# EAGLE board main (EAGLE 9.5.1)
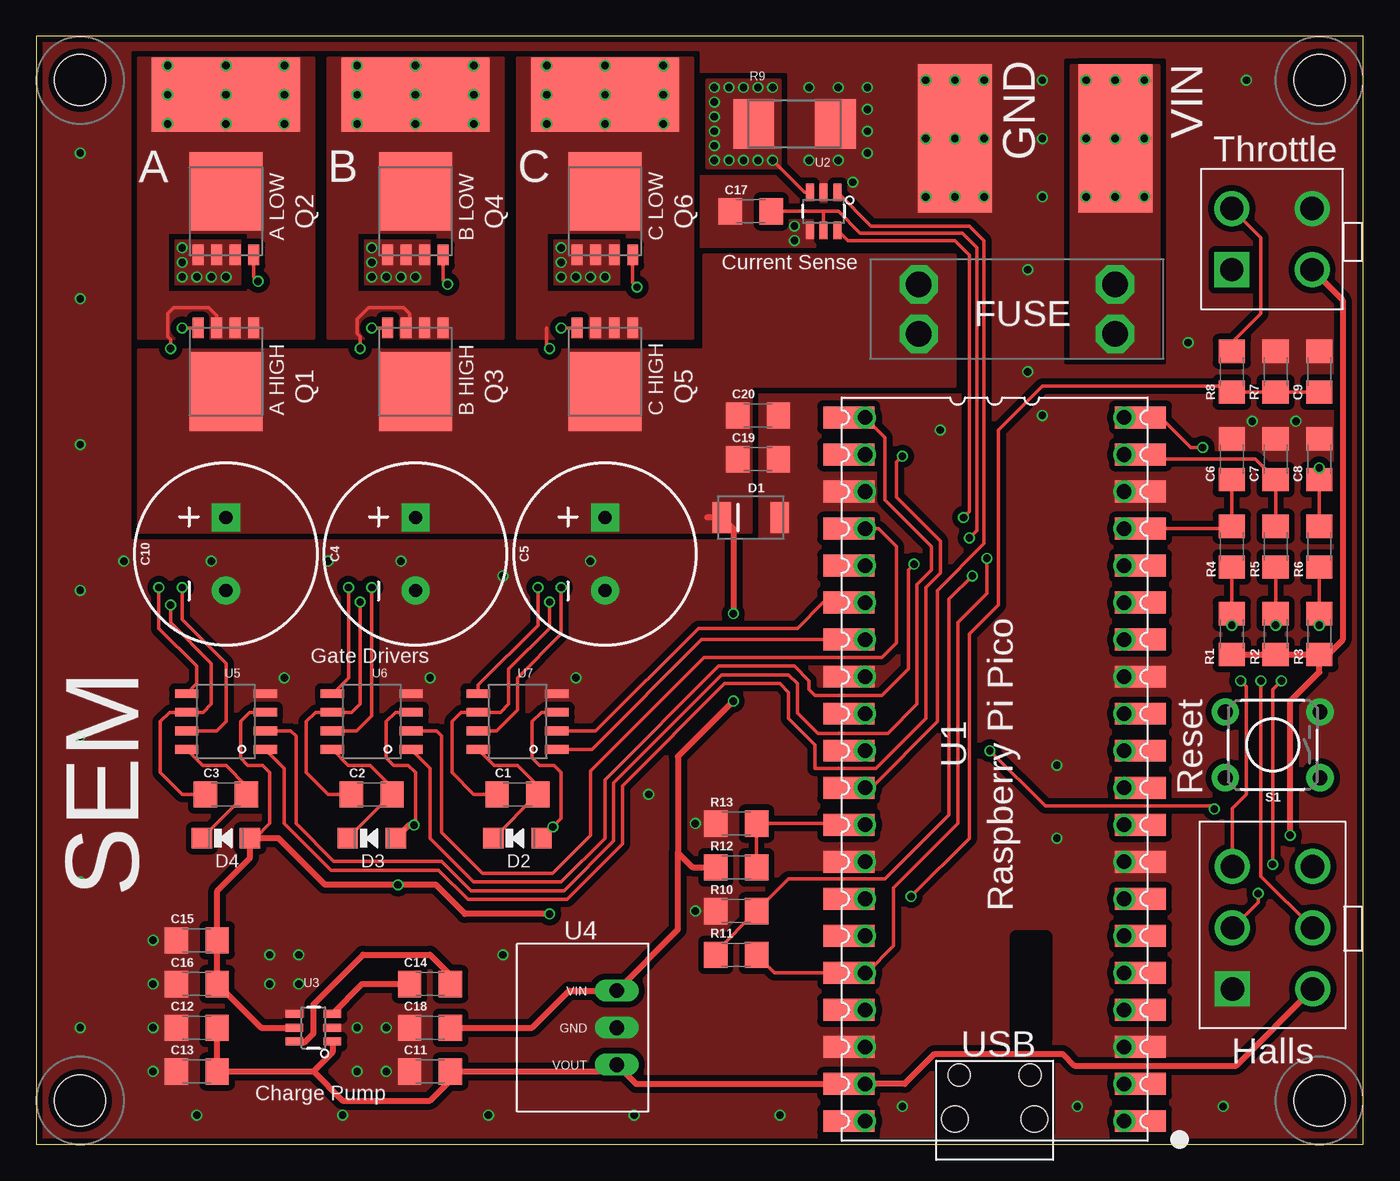
[diagram p0: board, top side]
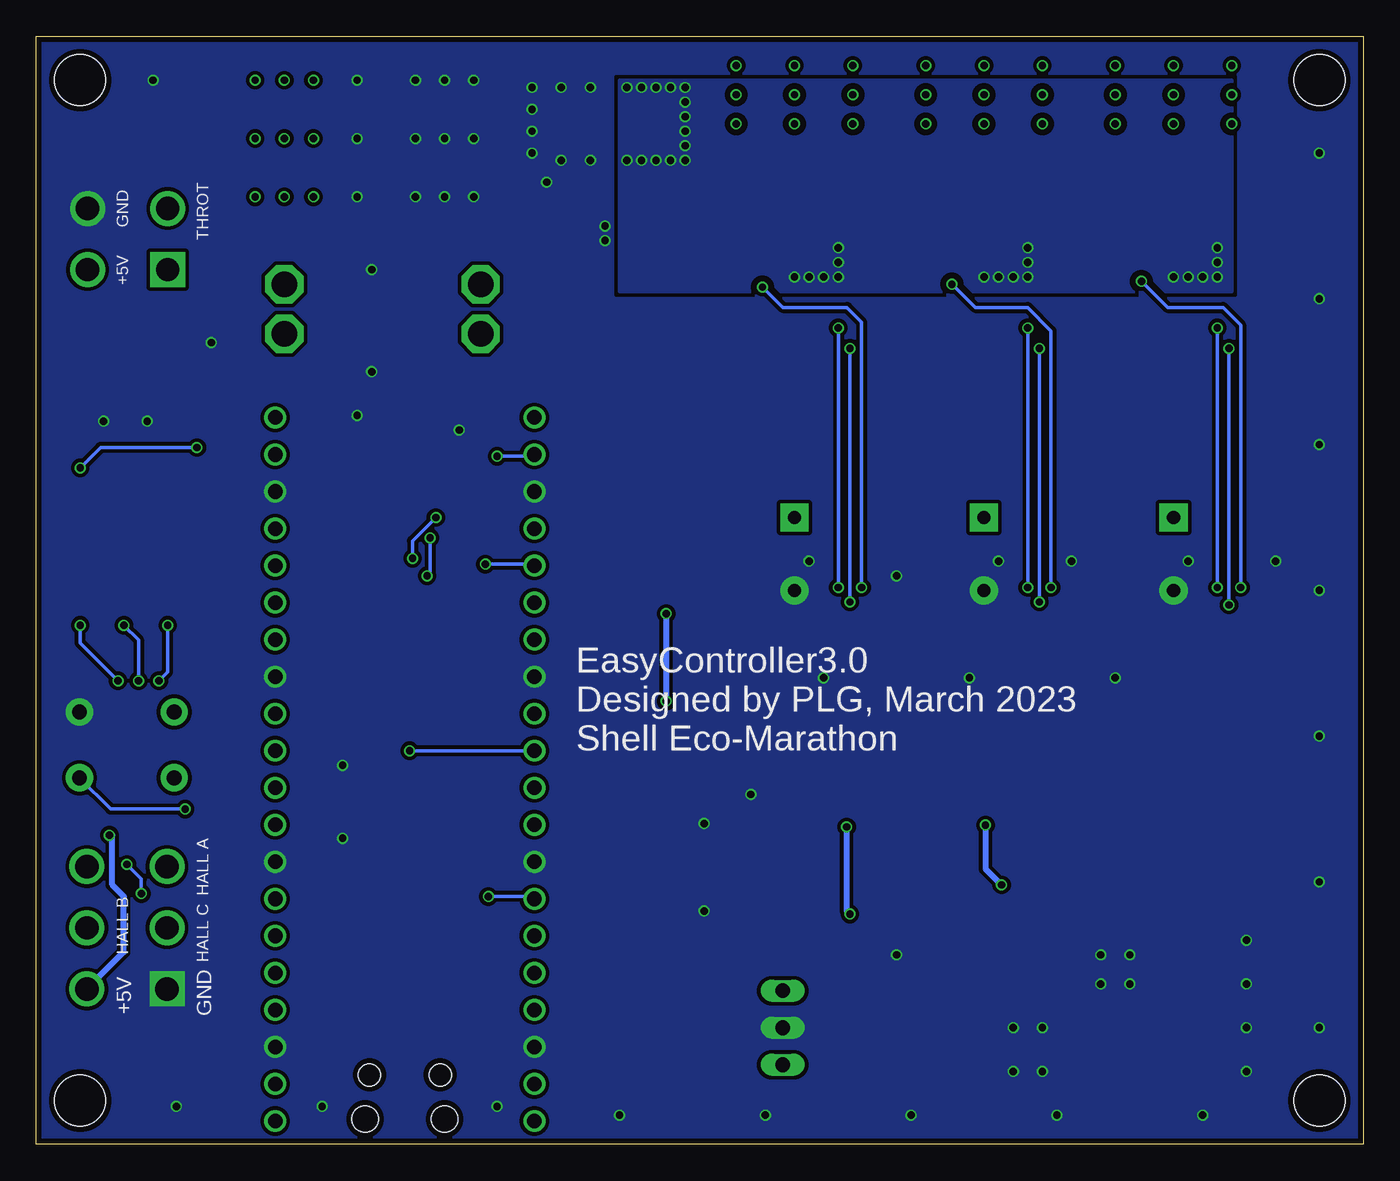
[diagram p1: board, bottom side, seen from below]

Size 91 x 76 mm. Coordinates in mm from the lower left corner, seen from the top.
Outline: 0,0 91,0 91,76 0,76 0,0
Copper layers (1*16): Top 0.035559375mm / dielectric 1.6mm / Bottom 0.035559375mm
Design rules "PATRICK-2lyr *": minimum track width 6mil, minimum drill 10mil, track to track 6mil, track to pad 6mil, pad to pad 6mil, via to via 6mil, smd to smd 6mil, copper to edge 15mil, drill to drill 6mil, minimum pad ring 5mil, minimum via ring 5mil, stop-mask expansion 2.5mil, vias tented up to drill 25mil, thermal gap 10mil

## Footprints (pad centres in the part's own frame; a part is rotated, then mirrored left to right if it is on the bottom)
1206 = smd 1.6 x 1.8: 1 -1.4,0; 2 1.4,0
CPOL-RADIAL-5MM-10MM = drill 0.9 pad 1.93 square: + 2.5,0 | drill 0.9 pad 1.93: - -2.5,0
DO-214AC = smd 1.27 x 2.1: A 1.985,0; C -1.985,0
SOD-123 = smd 1.397 x 1.397: + -1.651,0; - 1.651,0
4PINVALULOK = drill 1.6 square: 1 0,5.5 | drill 1.6: 2 0,0; 3 4.2,5.5; 4 4.2,0
6PINVALULOK = drill 1.6 square: 1 -6.35,2.96 | drill 1.6: 2 -6.35,-2.54; 3 -2.15,2.96; 4 -2.15,-2.54; 5 2.05,2.96; 6 2.05,-2.54
AUTO_FUSE = drill 1.75 octagon: 1A 0,3.4; 1B 0,0; 2A 13.47,3.4; 2B 13.47,0
DFN5X6 = smd 0.75 x 1.4: 1 -1.905,-3; 2 -0.635,-3; 3 0.635,-3; 4 1.905,-3 | smd 5 x 5.4: PAD 0,1.37
R2512 = smd 2.8 x 3.4: 1 -2.8,0; 2 2.8,0
TACTILE_SWITCH_PTH_6.0MM = drill 1.016 pad 1.88: 1 -3.251,2.261; 2 3.251,2.261; 3 -3.251,-2.261; 4 3.251,-2.261
PICO-PKG-NO_DEBUG = drill 1: 1 -7.62,25.4; 2 -7.62,22.86; 3 -7.62,20.32; 4 -7.62,17.78; 5 -7.62,15.24; 6 -7.62,12.7; 7 -7.62,10.16; 8 -7.62,7.62; 9 -7.62,5.08; 10 -7.62,2.54; 11 -7.62,0; 12 -7.62,-2.54; 13 -7.62,-5.08; 14 -7.62,-7.62; 15 -7.62,-10.16; 16 -7.62,-12.7; 17 -7.62,-15.24; 18 -7.62,-17.78; 19 -7.62,-20.32; 20 -7.62,-22.86; 21 10.16,-22.86; 22 10.16,-20.32; 23 10.16,-17.78; 24 10.16,-15.24; 25 10.16,-12.7; 26 10.16,-10.16; 27 10.16,-7.62; 28 10.16,-5.08; 29 10.16,-2.54; 30 10.16,0; 31 10.16,2.54; 32 10.16,5.08; 33 10.16,7.62; 34 10.16,10.16; 35 10.16,12.7; 36 10.16,15.24; 37 10.16,17.78; 38 10.16,20.32; 39 10.16,22.86; 40 10.16,25.4 | smd 3.5 x 1.5: P$1 -8.73,25.4; P$2 -8.73,22.86; P$3 -8.73,20.32; P$4 -8.73,17.78; P$5 -8.73,15.24; P$6 -8.73,12.7; P$7 -8.73,10.16; P$8 -8.73,7.62; P$9 -8.73,5.08; P$10 -8.73,2.54; P$11 -8.73,0; P$12 -8.73,-2.54; P$13 -8.73,-5.08; P$14 -8.73,-7.62; P$15 -8.73,-10.16; P$16 -8.73,-12.7; P$17 -8.73,-15.24; P$18 -8.73,-17.78; P$19 -8.73,-20.32; P$20 -8.73,-22.86; P$21 11.27,-22.86; P$22 11.27,-20.32; P$23 11.27,-17.78; P$24 11.27,-15.24; P$25 11.27,-12.7; P$26 11.27,-10.16; P$27 11.27,-7.62; P$28 11.27,-5.08; P$29 11.27,-2.54; P$30 11.27,0; P$31 11.27,2.54; P$32 11.27,5.08; P$33 11.27,7.62; P$34 11.27,10.16; P$35 11.27,12.7; P$36 11.27,15.24; P$37 11.27,17.78; P$38 11.27,20.32; P$39 11.27,22.86; P$40 11.27,25.4 | hole 1.8: -1.455,25.27; 3.995,25.27 | hole 1.5: -1.155,22.24; 3.695,22.24
SOT23-6 = smd 0.55 x 1.2: 1 -0.95,-1.3; 2 0,-1.3; 3 0.95,-1.3; 4 0.95,1.3; 5 0,1.3; 6 -0.95,1.3
V78W_BACKWARDS = drill 1.016 long: GND 0,-3.81; IN 2.54,-3.81; OUT -2.54,-3.81
SOIC8 = smd 1.6 x 0.6: 1 -2.7,1.905; 2 -2.7,0.635; 3 -2.7,-0.635; 4 -2.7,-1.905; 5 2.7,-1.905; 6 2.7,-0.635; 7 2.7,0.635; 8 2.7,1.905
PAD = smd 10.16 x 5.08: PAD 0,0
M3HOLE = hole 3.5: 0,0

## Placement (x,y rotation side)
C1  1uF  [1206]  33,24 180 top
C2  1uF  [1206]  23,24 180 top
C3  1uF  [1206]  13,24 180 top
C4  470uF  [CPOL-RADIAL-5MM-10MM]  26,40.5 90 top
C5  470uF  [CPOL-RADIAL-5MM-10MM]  39,40.5 90 top
C6  22nF  [1206]  82,47 90 top
C7  22nF  [1206]  85,47 90 top
C8  22nF  [1206]  88,47 90 top
C9  22nF  [1206]  88,53 90 top
C10  470uF  [CPOL-RADIAL-5MM-10MM]  13,40.5 90 top
C11  1uF  [1206]  27,5 180 top
C12  1uF  [1206]  11,8 180 top
C13  1uF  [1206]  11,5 180 top
C14  1uF  [1206]  27,11 0 top
C15  1uF  [1206]  11,14 180 top
C16  1uF  [1206]  11,11 180 top
C17  1uF  [1206]  49,64 180 top
C18  1uF  [1206]  27,8 180 top
C19  1uF  [1206]  49.5,47 0 top
C20  1uF  [1206]  49.5,50 0 top
D1  TVS  [DO-214AC]  49,43 0 top
D2  [SOD-123]  33,21 180 top
D3  [SOD-123]  23,21 180 top
D4  [SOD-123]  13,21 180 top
J1  HEADER4VALULOK  [4PINVALULOK]  87.5,60 90 top
J2  HEADER6  [6PINVALULOK]  85,17 90 top
J3  FUSE  [AUTO_FUSE]  74,59 180 top
Q1  [DFN5X6]  13,53 180 top
Q2  [DFN5X6]  13,64 0 top
Q3  [DFN5X6]  26,53 180 top
Q4  [DFN5X6]  26,64 0 top
Q5  [DFN5X6]  39,53 180 top
Q6  [DFN5X6]  39,64 0 top
R1  2.2k  [1206]  82,35 270 top
R2  2.2k  [1206]  85,35 270 top
R3  2.2k  [1206]  88,35 270 top
R4  2.2k  [1206]  82,41 90 top
R5  2.2k  [1206]  85,41 90 top
R6  2.2k  [1206]  88,41 90 top
R7  47k  [1206]  85,53 270 top
R8  47k  [1206]  82,53 270 top
R9  0.001  [R2512]  52,70 180 top
R10  47k  [1206]  48,16 0 top
R11  47k  [1206]  48,13 0 top
R12  47k  [1206]  48,19 180 top
R13  2.2k  [1206]  48,22 0 top
S1  [TACTILE_SWITCH_PTH_6.0MM]  84.8,27.4 180 top
U1  [PICO-PKG-NO_DEBUG]  67,27 180 top
U2  INA181  [SOT23-6]  54,64 180 top
U3  TC1240A  [SOT23-6]  19,8 90 top
U4  K78U05  [V78W_BACKWARDS]  36,8 90 top
U5  DGD2304  [SOIC8]  13,29 180 top
U6  DGD2304  [SOIC8]  23,29 180 top
U7  DGD2304  [SOIC8]  33,29 180 top
U$4  PAD  [PAD]  74,69 90 top
U$5  PAD  [PAD]  63,69 270 top
U$6  PAD  [PAD]  13,72 0 top
U$7  PAD  [PAD]  26,72 0 top
U$8  PAD  [PAD]  39,72 0 top
U$10  SCREW  [M3HOLE]  88,73 0 top
U$11  SCREW  [M3HOLE]  88,3 0 top
U$12  SCREW  [M3HOLE]  3,3 0 top
U$13  SCREW  [M3HOLE]  3,73 0 top

## Library data of the parts
C1-C3 C6-C9 C11-C20 = SparkFun-Capacitors; PROD_ID: CAP-09822
C4 C5 C10 = SparkFun-Capacitors; PROD_ID: CAP-09538
D1 Q1-Q6 U4 = 2018
D2-D4 = Seeed-Diode; MPN: MMSD4148
J1-J3 R9 U2 U3 U5-U7 U$4-U$8 U$10-U$13 = Custom_old
R1-R8 R10-R13 = SparkFun-Resistors
S1 = SparkFun-Switches; PROD_ID: SWCH-08441; SF_SKU: COM-00097
U1 = RpiPico

## Nets
3.3V: R11.2 U1.36 U1.P$36 U2.6
5V: C11.1 C12.1 C13.1 J1.2 J2.2 R1.2 R2.2 R3.2 U1.39 U1.P$39 U3.1 U4.OUT
10V: C15.1 C16.1 D2.+ D3.+ D4.+ U3.5 U5.3 U6.3 U7.3
COM_A: C3.2 Q1.1 Q1.2 Q1.3 Q2.PAD U5.6 U$6.PAD
COM_B: C2.2 Q3.1 Q3.2 Q3.3 Q4.PAD U6.6 U$7.PAD
COM_C: C1.2 Q5.1 Q5.2 Q5.3 Q6.PAD U7.6 U$8.PAD
CTRL_AH: U1.21 U1.P$21 U5.2
CTRL_AL: U1.22 U1.P$22 U5.1
CTRL_BH: U1.24 U1.P$24 U6.2
CTRL_BL: U1.25 U1.P$25 U6.1
CTRL_CH: U1.26 U1.P$26 U7.2
CTRL_CL: U1.27 U1.P$27 U7.1
DRV_AH: Q1.4 U5.7
DRV_AL: Q2.4 U5.5
DRV_BH: Q3.4 U6.7
DRV_BL: Q4.4 U6.5
DRV_CH: Q5.4 U7.7
DRV_CL: Q6.4 U7.5
GND: C4.- C5.- C6.2 C7.2 C8.2 C9.2 C10.- C11.2 C12.2 C13.2 C15.2 C16.2 C17.2 C18.2 C19.2 C20.2 D1.A J1.4 J2.1 R7.1 R9.1 R10.1 R13.1 S1.3 U1.3 U1.8 U1.13 U1.18 U1.23 U1.28 U1.33 U1.38 U1.P$3 U1.P$8 U1.P$13 U1.P$18 U1.P$23 U1.P$28 U1.P$33 U1.P$38 U2.2 U2.4 U3.2 U3.4 U4.GND U5.4 U6.4 U7.4 U$5.PAD
HALL_A: C6.1 R4.2 U1.17 U1.P$17
HALL_B: C7.1 R5.2 U1.19 U1.P$19
HALL_C: C8.1 R6.2 U1.20 U1.P$20
ISENSE: U1.31 U1.P$31 U2.1
N$1: C2.1 D3.- U6.8
N$2: J2.3 R3.1 R6.1
N$3: C3.1 D4.- U5.8
N$4: J2.4 R2.1 R5.1
N$6: J2.5 R1.1 R4.1
N$7: J1.3 R8.1
N$8: C1.1 D2.- U7.8
N$9: S1.1 U1.30 U1.P$30
N$10: C17.1 R10.2 R11.1 U2.5
N$18: C14.1 U3.3
N$19: C14.2 U3.6
SHUNT+: Q2.1 Q2.2 Q2.3 Q4.1 Q4.2 Q4.3 Q6.1 Q6.2 Q6.3 R9.2 U2.3
THROTTLE: C9.1 R7.2 R8.2 U1.34 U1.P$34
V_PREFUSE: J3.1A J3.1B U$4.PAD
V_RAW: C4.+ C5.+ C10.+ C18.1 C19.1 C20.1 D1.C J3.2A J3.2B Q1.PAD Q3.PAD Q5.PAD R12.2 U4.IN
VBUS: U1.40 U1.P$40
VSENSE: R12.1 R13.2 U1.32 U1.P$32

## Tracks (layer width: path | path; a pad name or v marks a point on that pad's centre or on a via)
3.3V  (via drill 0.5)
  Top 0.254: U2.6 55.65,62 63,62 64,61 64,43.4 v63.6,43 | v65.2,40.2 65.2,37.8 63.2,35.8 63.2,22 58.8,17.6 58.8,13.6 56.96,11.76 U1.36 | R11.2 50.64,11.76 U1.36 | U1.P$36 U1.36
  Bottom 0.254: v63.6,43 65.2,41.4 v65.2,40.2
5V  (via drill 0.5)
  Top 0.406: J2.2 82.29,5.4 71.2,5.4 70.4,6.2 61.6,6.2 59.54,4.14 U1.39 | R1.2 R2.2 R3.2 | R3.2 88,32.4 86,30.4 v86,21.2 | J1.2 89.6,57.9 89.6,34.6 88.6,33.6 R3.2 | C12.1 C13.1 19,5 | 19,5 21,3 27,3 28.4,4.4 C11.1 39.35,5 U4.OUT 41.13,4.14 U1.39 | U3.1 20.3,6.3 19,5 | U1.P$39 U1.39
  Bottom 0.406: J2.2 85,13.19 85,17 85.8,17.8 85.8,21.2 v86,21.2
10V  (via drill 0.5)
  Top 0.254: U6.3 24.64,29.64 24,29 24,26.5 24.5,26 25.5,26 26,25.5 26,22 v25.9,21.9 | U5.3 14.63,29.64 14,29 14,26.5 14.5,26 15.5,26 16,25.5 16,22 15,21 D4.+ | U7.3 34.63,29.64 34,29 34,26.5 34.5,26 35.5,26 36,25.5 36,22.35 v35.42,21.77
  Top 0.406: U3.5 15.4,8 C16.1 C15.1 12.4,17.4 14.65,19.65 D4.+ | D3.+ 25.55,21.9 v25.9,21.9 | 15,21 16.6,21 19.8,17.8 v24.8,17.8 27.4,17.8 29.4,15.8 v35.2,15.8 | D2.+ v35.42,21.77
  Bottom 0.406: v25.9,21.9 25.9,18.9 v24.8,17.8 | v35.42,21.77 35.42,16.03 v35.2,15.8
COM_A  (via drill 0.5)
  Top 0.254: C3.2 10,24 8.5,25.5 8.5,29 9.13,29.64 U5.6 11.44,29.64 12,30.2 12,33 9.2,35.8 v9.2,37 | v9.2,54.6 9.2,55.2 9,55.4 9,57 9.4,57.4 11.8,57.4 12.37,56.84 Q1.3
  Bottom 0.254: v9.2,37 v9.2,54.6
  other vias: 13,72 9,74 9,72 9,70 13,70 13,74 17,74 17,72 17,70
  pour Top (isolate 0.406, rank 2, no thermals): 7,74.5 7,55.3 19,55.3 19,74.5
COM_B  (via drill 0.5)
  Top 0.254: C2.2 20,24 18.5,25.5 18.5,29 19.14,29.64 U6.6 21.64,29.64 22.2,30.2 v22.2,37.2 | v22.2,54.6 22.2,55.4 22,55.6 22,56.6 22.8,57.4 25.2,57.4 25.6,57 25.6,56.23 Q3.3
  Bottom 0.254: v22.2,37.2 v22.2,54.6
  other vias: 26,72 22,70 22,72 22,74 26,74 26,70 30,70 30,72 30,74
  pour Top (isolate 0.406, rank 2, no thermals): 20,74.5 20,55.3 32,55.3 32,74.5
COM_C  (via drill 0.5)
  Top 0.254: C1.2 30,24 28.5,25.5 28.5,29 29.14,29.64 U7.6 31.84,29.64 32.4,30.2 32.4,32.6 35.2,35.4 v35.2,37.2 | v35.2,54.6 35,54.8 35,56
  Bottom 0.254: v35.2,37.2 v35.2,54.6
  other vias: 39,72 35,74 35,72 35,70 39,70 39,74 43,74 43,72 43,70
  pour Top (isolate 0.406, rank 2, no thermals): 33,74.5 33,55.3 45,55.3 45,74.5
CTRL_AH
  Top 0.254: U5.2 17.43,28.36 17.8,28 17.8,22 20.4,19.4 27.8,19.4 29.8,17.4 36.2,17.4 39.6,20.8 39.6,24.8 47,32.2 51.6,32.2 52.2,31.6 52.2,29.6 53.6,28.2 58.4,28.2 60.4,30.2 60.4,38.4 61.4,39.4 61.4,41 58.2,44.2 58.2,48.5 U1.21 U1.P$21
CTRL_AL  (via drill 0.5)
  Top 0.254: U5.1 17,25.8 17,22 20.2,18.8 27.6,18.8 29.6,16.8 36.4,16.8 40.2,20.6 40.2,24.6 47.2,31.6 51,31.6 51.6,31 51.6,29.2 53.4,27.4 53.4,25.8 57.6,25.8 61,29.2 61,38.2 62,39.2 62,41.4 59,44.4 59,46.8 v59.4,47.2 | U1.P$22 U1.22
  Bottom 0.254: v59.4,47.2 56.96,47.2 U1.22
CTRL_BH
  Top 0.254: U6.2 27.43,28.36 27.8,28 27.8,21.4 30.6,18.6 35.4,18.6 38,21.2 38,25.6 45.8,33.4 58,33.4 59,34.4 59,41 57.76,42.24 57,42.24 U1.24 U1.P$24
CTRL_BL  (via drill 0.5)
  Top 0.254: U6.1 27,25.8 27,21 30,18 36,18 39,21 39,25 46.8,32.8 52,32.8 53,31.8 53,31.2 53.4,30.8 58,30.8 59.8,32.6 59.8,39.4 v60.2,39.8 | U1.P$25 U1.25
  Bottom 0.254: v60.2,39.8 56.94,39.8 U1.25
CTRL_CH
  Top 0.254: U7.2 38.37,28.36 45.4,35.4 52.2,35.4 53.96,37.16 U1.P$26 56,37.16 U1.26
CTRL_CL
  Top 0.254: U7.1 38.09,27.09 45.62,34.62 U1.P$27 56,34.62 U1.27
DRV_AH  (via drill 0.5)
  Top 0.254: Q1.4 v10,56 | v10,38.2 10,36 13,33 13,29 12.37,28.36 U5.7
  Bottom 0.254: v10,56 v10,38.2
DRV_AL  (via drill 0.5)
  Top 0.254: Q2.4 14.9,59.49 v15.2,59.2 | v8.4,38.2 8.4,35.4 11,32.8 11,31.61 U5.5
  Bottom 0.254: v15.2,59.2 13.4,57.4 9.6,57.4 8.4,56.2 v8.4,38.2
DRV_BH  (via drill 0.5)
  Top 0.254: Q3.4 v23,56 | U6.7 21.96,28.36 23,29.4 v23,38.2
  Bottom 0.254: v23,56 v23,38.2
DRV_BL  (via drill 0.5)
  Top 0.254: Q4.4 27.91,59.3 v28.2,59 | v21.4,38.2 21.4,32.01 U6.5
  Bottom 0.254: v28.2,59 26.6,57.4 23,57.4 21.4,55.8 v21.4,38.2
DRV_CH  (via drill 0.5)
  Top 0.254: Q5.4 v36,56 | v36,38.2 36,35 33,32 33,29.8 31.57,28.36 U7.7
  Bottom 0.254: v36,56 v36,38.2
DRV_CL  (via drill 0.5)
  Top 0.254: Q6.4 40.91,59.09 v41.2,58.8 | v34.4,38.2 34.4,35.6 30.3,31.5 U7.5
  Bottom 0.254: v41.2,58.8 39.8,57.4 35.4,57.4 34.4,56.4 v34.4,38.2
GND  (via drill 0.5)
  other vias: 63,65 61,73 63,73 65,73 65,69 63,69 61,69 61,65 65,65 53,72.5 55,72.5 57,72.5 57,71 57,69.5 55,67.5 53,67.5 57,68 52,62 56,66 16,11 16,13 18,13 24,8 24,5 22,5 22,8 18,11 8,5 8,8 8,11 8,14 45.2,22 45.2,16 52,63 3,68 3,58 3,48 3,38 3,28 3,18 3,8 38,40 32,39 25,40 20,40 12,40 6,40 68,53 69,50 62,49 83,73 79,55 83.4,49.6 86.4,49.6 81.4,2.6 71.4,2.6 59.4,2.6 51,2 41,2 31,2 21,2 11,2 32,13 42,24 37,32 27,32 17,32 70,26 70,21 68,60 69,65 69,69 69,73
  pour Bottom (isolate 0.254, rank 5, no thermals): -2,78 -2,-2 93,-2 93,78
  pour Top (isolate 0.406, rank 5, no thermals): -1,77 -1,-0.75 arc90 -0.75,-1 92,-1 92,75.75 arc90 90.75,77
HALL_A
  Top 0.254: C6.1 R4.2 81.84,42.24 U1.P$17 U1.17
HALL_B
  Top 0.254: R5.2 C7.1 83.6,47 76.05,47 U1.P$19 U1.19
HALL_C  (via drill 0.5)
  Top 0.254: R6.2 C8.1 v88,46.4 | v80,47.8 79.2,47.8 77.14,49.86 U1.P$20 U1.20
  Bottom 0.254: v80,47.8 86.6,47.8 v88,46.4
ISENSE
  Top 0.254: U2.1 57.25,63 64,63 65,62 65,41.2 61.8,38 61.8,29 57.26,24.46 U1.P$31 U1.31
N$1
  Top 0.254: U6.8 21.39,26 22.9,26 24.4,24.5 C2.1 24.35,24 D3.-
N$2  (via drill 0.5)
  Top 0.254: J2.3 83.8,16.61 v83.8,17.2 | v84.8,19.2 84.8,31.2 v85.4,31.8 | v88,35.6 R3.1 R6.1
  Bottom 0.254: v83.8,17.2 83.8,18.2 v84.8,19.2 | v85.4,31.8 88,34.4 v88,35.6
N$3
  Top 0.254: U5.8 11.39,26 13,26 14.4,24.6 C3.1 14.35,24 D4.-
N$4  (via drill 0.5)
  Top 0.254: v85,35.6 R2.1 R5.1 | v84,31.8 84,18.39 J2.4
  Bottom 0.254: v85,35.6 84,34.6 v84,31.8
N$6  (via drill 0.5)
  Top 0.254: J2.5 82.04,23.04 83,24 83,31.4 v82.6,31.8 | v82,35.6 R1.1 R4.1
  Bottom 0.254: v82.6,31.8 82,32.4 v82,35.6
N$7
  Top 0.254: J1.3 84,62.2 84,57 82,55 R8.1
N$8
  Top 0.254: U7.8 31.39,26 33,26 34.4,24.6 C1.1 34.35,24 D2.-
N$9  (via drill 0.5)
  Top 0.254: v65.4,27 69.2,23.2 80.6,23.2 v80.8,23 | U1.P$30 U1.30
  Bottom 0.254: S1.1 85.91,23 v80.8,23 | U1.30 v65.4,27
N$10  (via drill 0.5)
  Top 0.254: C17.1 54,64 | U2.5 54,64 | 54,64 55,64 56.5,62.5 63.5,62.5 64.5,61.5 64.5,42.1 v64,41.6 | v64.2,39 62.6,37.4 62.6,22.6 58.2,18.2 51.6,18.2 R10.2 46.6,13.2 R11.1
  Bottom 0.254: v64,41.6 64,39.2 v64.2,39
N$18
  Top 0.406: U3.3 22.35,11 C14.1
N$19
  Top 0.406: U3.6 17.75,7 18.4,7 19,7.6 19,9.6 22.4,13 27,13 28.4,11.6 C14.2
SHUNT+  (via drill 0.5)
  Top 0.254: U2.3 52.7,65.3 v50.5,67.5
  other vias: 36,61.5 36,60.5 36,59.5 37,59.5 38,59.5 39,59.5 23,61.5 23,60.5 23,59.5 24,59.5 25,59.5 26,59.5 10,61.5 10,60.5 10,59.5 11,59.5 12,59.5 13,59.5 46.5,71.5 46.5,70.5 46.5,69.5 46.5,68.5 46.5,67.5 47.5,67.5 48.5,67.5 49.5,67.5 46.5,72.5 47.5,72.5 48.5,72.5 49.5,72.5 50.5,72.5
  pour Top (no thermals): 40,62 35.5,62 35.5,59 40,59
  pour Top (no thermals): 27,62 22.5,62 22.5,59 27,59
  pour Top (no thermals): 14,62 9.5,62 9.5,59 14,59
  pour Bottom (isolate 0.406): 9,58.5 51,58.5 51,73 9,73
  pour Top (isolate 0.406, no thermals): 46,73 46,67 51,67 51,73
THROTTLE  (via drill 0.5)
  Top 0.254: C9.1 R7.2 R8.2 81.6,52 69,52 66,49 66,37 64,35 64,21 v60,17 | U1.P$34 U1.34
  Bottom 0.254: U1.34 57,17 v60,17
V_PREFUSE  (via drill 0.5)
  other vias: 74,69 72,73 72,69 72,65 74,65 76,65 76,69 76,73 74,73
  pour Top (isolate 0.406, no thermals): 71,74 71,54 77,54 77,74
V_RAW  (via drill 0.5)
  Top 0.406: 46,43 D1.C 47.8,42.22 v47.8,36.4 | v47.8,30.4 44,26.6 44,20 | 44,20 45,19 R12.2 | 44,20 44,14.73 U4.IN 36.54,10.54 34,8 C18.1
  Bottom 0.406: v47.8,36.4 v47.8,30.4
  pour Top (isolate 0.406, rank 2, no thermals): 7,54.5 7,42 49,42 49,52 63,52 63,61 45.8,61 45.8,54.5
VBUS
  Top 0.254: U1.P$40 U1.40
VSENSE
  Top 0.254: R12.1 R13.2 56.76,22 U1.32 U1.P$32

## Text on the board
tPlace: VIN | GND | Throttle | A | B | C | A LOW | B LOW | C LOW | Current Sense | FUSE | A HIGH | B HIGH | C HIGH | Gate Drivers | Reset | SEM | Raspberry Pi Pico | Halls | USB | Charge Pump
bPlace: THROT | GND | +5V | EasyController3.0 / Designed by PLG, March 2023 / Shell Eco-Marathon | HALL A | HALL B | HALL C | GND | +5V